# Altium PCB УШЯИ.411618.029Э.pcbdoc (part 5 of 6)
Units mil, origin at the board's own origin, x right, y up, seen from the top; angles counter-clockwise.
Board outline 13385.8 x 6692.9 mil, 4 copper layers (Top Layer, Supply, GND, Bottom Layer), stack 62.3 mil thick; 637 components, 474 nets, 1978 pads, 458 vias.
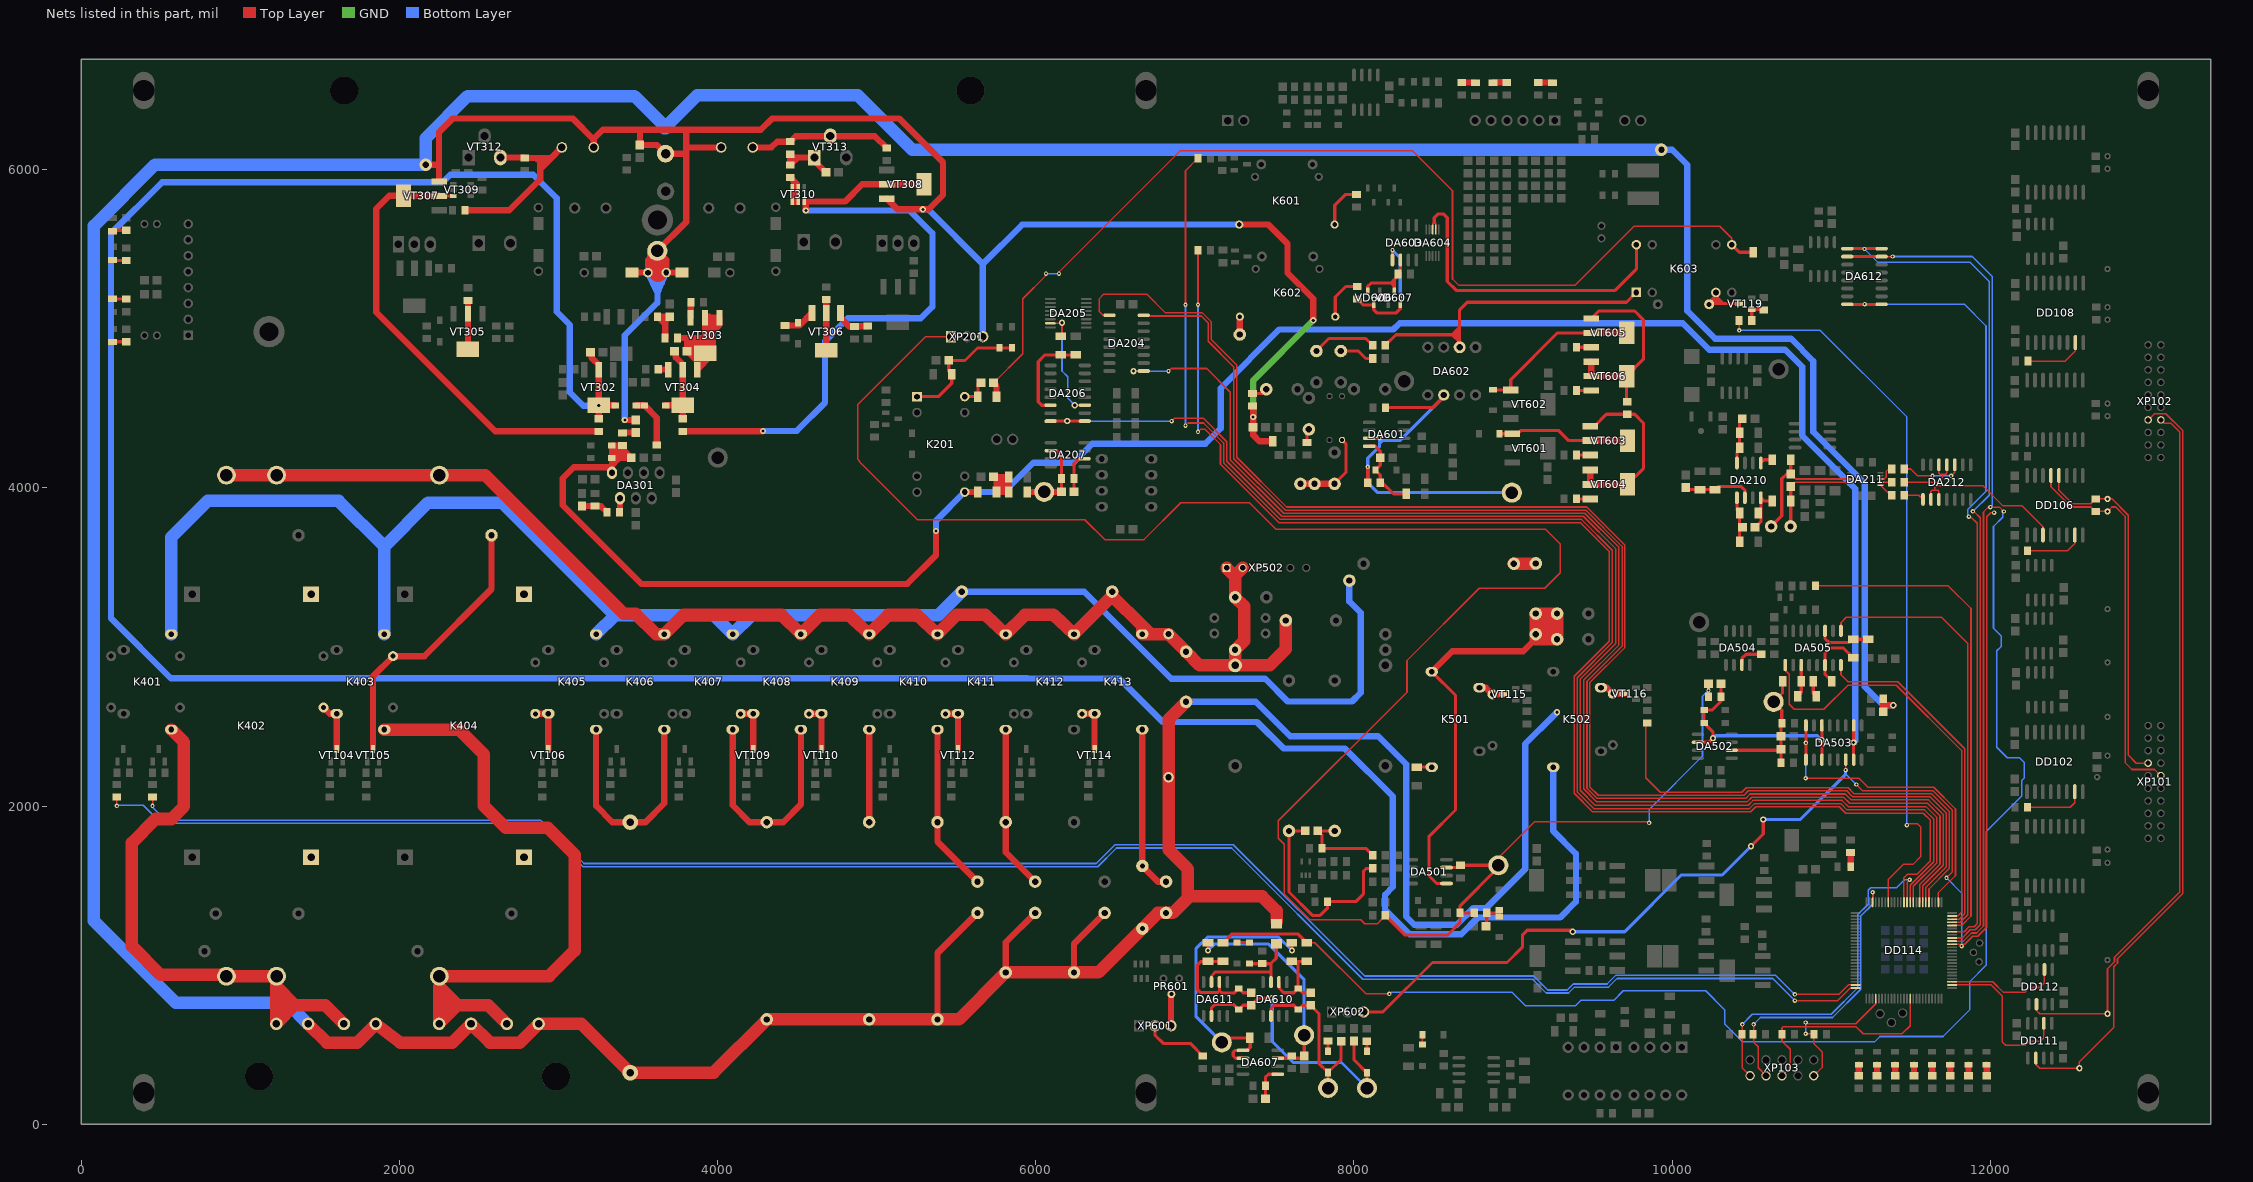
[diagram p7: the nets of this part, all layers, seen from the top]

## Via types
v1: diameter 27.6, hole 11.8, Top Layer to Bottom Layer, 218 vias
v2: diameter 39.4, hole 19.7, Top Layer to Bottom Layer, 213 vias
v3: diameter 27.6, hole 12, Top Layer to Bottom Layer, 24 vias
v4: diameter 78.7, hole 39.4, Top Layer to Bottom Layer, 3 vias

## Nets (pads, with @x,y where several pads share a name; then routed paths per layer and width w, separated by ;. In a path a pad name is that pad's centre, name@x,y a point inside that pad or via, vN(x,y) a via of type N, cw(c..) or ccw(c..) an arc to the next point about the centre after c; other vN are vias at no path point) (continued)
INAM: C302.2 DA301.1 DA503.7 DA503.10 K201.8 R209.2 R303.2 VD301.2 VD302.1 | length 13354.9
  Top Layer w19.7: DA503.7@11140.8,2291.4 v2(11140.8,2399.9) DA503.10@11140.8,2506.8
  Top Layer w39.4: R303.2@3400.2,4263.9 R303.2@3403,4266.6 ; v2(5373.2,3727.9) 5373.2,3576 5193.3,3396.1 3521.6,3396.1 3027.6,3890.1 3027.6,4060.6 3096.5,4129.6 DA301.1@3336.4,4129.6 ; K201.8@5553.6,3973.2 R209.2@5636.7,3974 ; VD302.1@3336.1,4187.9 3336.1,4199.7 VD302.1@3336.2,4199.9 ; VD302.1@3336.1,4187.9 VD302.1@3336.3,4187.9 ; VD302.1@3336.1,4187.9 VD302.1@3336.3,4187.7 ; VD301.2@3336.1,4266.6 R303.2@3403,4266.6 ; VD301.2@3336.1,4266.6 VD302.1@3336.2,4199.9 ; VD301.2@3336.1,4266.6 3369.5,4233.2 ; VD302.1@3336.2,4199.9 VD302.1@3336.3,4187.9 ; VD302.1@3336.2,4199.9 3369.5,4233.2 ; VD302.1@3336.3,4187.7 DA301.1@3336.4,4129.6 ; VD302.1@3336.3,4187.7 VD302.1@3336.3,4187.9 ; VD302.1@3336.3,4187.7 3345.5,4178.4 3372.2,4178.4 ; VD302.1@3336.3,4187.9 3381.7,4187.9 ; DA301.1@3336.4,4129.6 3336.5,4095.4 3336.5,4129.6 3336.5,4142.6 3372.2,4178.4 ; 3369.5,4233.2 R303.2@3400.2,4263.8 ; 3369.5,4233.2 3400.2,4202.5 ; 3372.2,4178.4 3381.7,4187.9 ; 3381.7,4187.9 3382.9,4189.1 3400.2,4189.1 ; 3381.7,4187.9 3400.2,4187.9 ; 3400.2,4187.9 3456.1,4187.9 C302.2@3457.3,4189.1 ; 3400.2,4187.9 3400.2,4189.1 ; 3400.2,4189.1 3413.6,4189.1 ; 3400.2,4189.1 3400.2,4202.5 ; 3400.2,4202.5 3413.6,4189.1 ; 3400.2,4202.5 R303.2@3400.2,4263.8 ; R303.2@3400.2,4263.8 R303.2@3403,4266.6 ; R303.2@3403,4266.6 3403,4243.4 C302.2@3457.3,4189.1 ; 3413.6,4189.1 C302.2@3457.3,4189.1
  Bottom Layer w39.4: v2(5373.2,3727.9) 5373.2,3792.9 5554.7,3974.4 5801.6,3974.4 5985.4,4158.3 6235,4158.3 6354.3,4277.6 7066.5,4277.6 7162.2,4373.2 7162.2,4626.4 7531.5,4995.7 8248.4,4995.7 8287.8,5035 10066.5,5035 10233.4,4868.1 10709.8,4868.1 10816.9,4761 10816.9,4328.3 11151.2,3994.1 11151.2,2410.2 v2(11140.8,2399.9)
INSF: DA604.7 DA604.8 K603.14 | length 2053.5
  Top Layer w10: DA604.8@8494.2,5624 8494.2,5662.8 8498.2,5666.9 8509.9,5666.8 8513.9,5662.8 DA604.7@8513.9,5624
  Top Layer w19.7: 8504.6,5666.9 8504.6,5697.7 8526.3,5720.1 8564.8,5720.1 8586.6,5698.3 8586.6,5296.7 8642,5241.3 9641.7,5241.3 9774.7,5374.4 K603.14@9774.7,5528.1
IOC: C211.1 K603.8 R213.1 R649.2 | length 6608.2
  Top Layer w10: C211.1@5734.2,4659 5918.5,4843.3 5918.5,5189 6064.7,5335.1 v1(6064.7,5346.3) ; v1(6145.9,5345.9) 6145.9,5356.2 6909.4,6119.7 8366.9,6119.7 8619.3,5867.3 8619.3,5312.6 8657.5,5274.4 9390.5,5274.4 9759.4,5643.3 10299.6,5643.3 10374.8,5568.1 K603.8@10374.8,5528.1
  Top Layer w19.7: K603.8@10374.8,5528.1 10422.5,5480.4 R649.2@10508.7,5480.4
  Top Layer w39.4: C211.1@5734.3,4659 5753.2,4640.2 R213.1@5753.1,4572.4
  Bottom Layer w10: v1(6064.7,5346.3) 6145.5,5346.3 v1(6145.9,5345.9)
K201_14: C211.2 K201.14 R213.2 | length 188.6
  Top Layer w19.7: K201.14@5553.6,4573.2 5636.7,4572.4 5636.7,4659 C211.2@5655.6,4659
K402_8: K402.8
K402_10: K402.10
K404_8: K404.8
K404_10: K404.10
K501_14: K501.14 R505.2 | length 94
  Top Layer w19.7: R505.2@8394.8,2244.3 K501.14@8488.8,2244.3
K603_3: K603.3 VD128.2 VT119.3 | length 458.1
  Top Layer w19.7: VD128.2@10236.4,5157.6 10283.6,5157.6 ; 10259.9,5181.3 10283.6,5157.6 ; 10274.4,5195.8 10274.4,5182 10286.4,5170.3 10286.4,5157.6 ; K603.3@10274.4,5203.6 10274.8,5203.2 10320.4,5157.6 ; 10294.8,5178.3 10294.8,5157.6 ; 10302.2,5157.6 10294.8,5157.6 ; VT119.3@10421.4,5157.6 10320.4,5157.6 ; 10283.6,5157.6 10286.4,5157.6 ; 10283.6,5157.6 10294.8,5157.6 ; 10286.4,5157.6 10294.8,5157.6 ; 10294.8,5157.6 10320.4,5157.6
  Top Layer w39.4: VD128.2@10232.3,5153.6 10274.4,5195.8 10274.8,5196.1 10274.8,5203.2 K603.3@10274.8,5228
KT602_1: DA601.7 DA602.2 KT602.1 R610.2 R613.1 | length 2368.6
  Top Layer w19.7: R613.1@8086.6,4033 v1(8086.6,4131.4) ; DA601.7@8095.6,4311.1 8161.5,4311.1 v1@8161.5,4312.5 ; R610.2@8199.2,4504.3 8495.3,4504.3 8564.2,4573.2 DA602.2@8564.2,4583.8
  Bottom Layer w19.7: 8177.2,4296.7 8161.4,4281 ; DA602.2@8564.2,4583.8 8564.2,4573.5 8287.4,4296.7 8177.1,4296.7 8161.4,4312.4 8161.4,4281 ; KT602.1@8992.1,3969.7 8149.6,3969.7 8086.6,4032.7 v1(8086.6,4131.4) 8086.6,4186.5 8161.4,4261.3 8161.4,4281
  other v1: 8161.4,4312.5
KT604_1: C617.1 DA607.7 KT604.1 R636.1 R642.1 | length 1398.6
  Top Layer w19.7: v2(7081.9,1092.2) 7081.9,1139.4 R642.1@7082.6,1140.2 ; DA607.7@7520.9,414.5 7673,414.5 C617.1@7687.3,428.9 ; KT604.1@7686.5,544.3 7687.3,543.5 C617.1@7687.3,429
  Bottom Layer w19.7: v2(7081.9,1092.2) 7122,1132.3 7463.4,1132.3 7686.5,909.1 KT604.1@7686.5,560.5
KT605_1: DA607.1 DA607.2 KT605.1 R638.1 R640.1 | length 1831.8
  Top Layer w19.7: KT605.1@7169.2,514.4 7198,543.1 R638.1@7345.6,543.1 7348.1,540.7 7348.1,484.1 7328.6,464.6 DA607.1@7302.6,464.6 ; DA607.2@7302.6,414.5 7255.6,414.5 7241.3,429 7241.3,452.6 7253.1,464.4 7297.3,464.4 7297.5,464.5 DA607.1@7302.6,464.5 ; R640.1@7609.8,1140.2 7610.2,1139.8 v2(7610.2,1091.8)
  Bottom Layer w19.7: KT605.1@7169.2,514.4 7008.3,675.3 7008.3,1105.1 7079.9,1176.8 7525.2,1176.8 v2(7610.2,1091.8)
LIM: DD112.6 DD114.28 | length 716.7
  Top Layer w10: DD114.28@11759.8,895.2 11760.1,894.9 12015.7,894.9 12082.3,828.3 12216.6,828.3 12248.1,859.7 12311.1,859.7 12339.8,888.5 DD112.6@12339.8,972.6
LIMITN: DD112.2 pad.7@12736.2,694.4 XP102.8 | length 4489.6
  Top Layer w10: DD112.2@12289.8,755.7 12289.8,715.3 12310.7,694.4 pad.7@12736.2,694.4 12736.2,977.9 12780,1021.6 12780,1049.2 13189,1458.2 13189,4351.9 13133.9,4407 13090.6,4407 XP102.8@13070.9,4426.7
LM1: DA612.7 DA612.10 DD114.41 R639.1 R641.1 | length 14071.6
  Top Layer w10: R639.1@7704.3,1140.2 7754.3,1140.2 8075.2,819.3 v1(8222.8,819.3) ; DA612.7@11316.4,5453.3 v1@11385.9,5454 ; DD114.41@11759.9,1151.1 11831,1151.1 11881.9,1202 11913.4,1202 11956.7,1245.3 11956.7,3847.7 11988.2,3879.2 v1@12000,3879.2 ; v1(12000,3879.1) 12056.7,3879.1 v1(12084.6,3851.2)
  Top Layer w19.7: R641.1@7177.1,1140.2 7231.8,1194.9 7649.6,1194.9 R639.1@7704.3,1140.2 ; DA612.10@11101,5453.3 DA612.7@11316.4,5453.3
  Bottom Layer w10: v1(8222.8,819.3) 8233.4,829.9 8992.9,829.9 9077.5,745.3 9392.9,745.3 9426,778.3 9633.1,778.3 9692.9,838.2 10210.6,838.2 10329.5,719.3 10329.5,631.1 10440.9,519.7 11274.4,519.7 11306.3,551.6 11701.9,551.6 11871.2,720.9 11871.2,897.6 11974.8,1001.2 11974.8,1840.2 12197.6,2063 12197.6,2161 12213.8,2177.2 12213.8,2272.4 12182.7,2303.5 12106.3,2303.5 12040.5,2369.3 12040.5,2975.2 12067.7,3002.4 12067.7,3069.3 12019.3,3117.7 12019.3,3757.1 12077.1,3815 12077.1,3843.7 v1(12084.6,3851.2) ; v1@11385.9,5454 11885.9,5454 12011.7,5328 12011.7,3891 v1@11999.9,3879.2
  other v1: 11385.8,5453.9
LM2: DA503.6 DD114.40 XP602.3 | length 8452.3
  Top Layer w10: v1@11090.6,2225.6 DA503.6@11090.8,2291.4 ; v1(11157.5,2135) 11195.3,2097.2 11638.6,2097.2 11761,1974.8 11761,1585 v1(11724.4,1548.4) ; DD114.40@11759.9,1131.4 11806.8,1131.4 ; v1(12023.6,3843.7) 12002,3843.7 11976.4,3818.1 11976.4,1237.4 11921.3,1182.3 11889.8,1182.3 11838.9,1131.4 11831,1131.4 ; 11806.8,1131.4 v1(11818.9,1119.3) 11831,1131.4 ; 11806.8,1131.4 11831,1131.4
  Top Layer w19.7: XP602.3@8060.6,705.5 8181.9,705.5 8493.3,1016.9 8961.8,1016.9 9058.2,1113.4 9058.2,1188.2 9089.4,1219.3 9365.7,1219.3 v2(9374.8,1210.2) ; v2(10495.3,1747.2) 10572,1824 v2(10572,1915.4)
  Bottom Layer w10: 11090.5,2202 v1(11157.5,2135) ; v1(11724.4,1548.4) 11818.9,1453.9 v1(11818.9,1119.3)
  Bottom Layer w19.7: v2(9374.8,1210.2) 9701.2,1210.2 10057.1,1566.1 10314.2,1566.1 v2(10495.3,1747.2) ; v2(10572,1915.4) 10805.1,1915.4 11090.5,2200.8 11090.5,2202 v1(11090.5,2225.6)
NV: C401.2 C501.1 C504.1 FV501.1 K402.4 K402.6 K404.4 K406.14 K408.14 K409.14 K410.14 K411.14 K412.14 K413.14 R401.1 R402.1 R501.1 XP502.1 XP502.2 | length 9010.7
  Top Layer w39.4: 7250.3,3447.1 7253,3450.3 7253.2,3450.5
  Top Layer w78.7: K402.4@913.4,4079.9 K402.6@1228.3,4079.9 K404.4@2252,4079.9 2539,4079.9 3410.6,3208.3 3485.8,3208.3 3613.4,3080.7 3665.8,3080.7 3787,3202 4402.8,3202 K408.14@4524,3080.7 4644.9,3202 4823.5,3202 4953.2,3080.7 5074.1,3202 5252.7,3202 5382.3,3080.8 5503.2,3202 5681.8,3202 5811.4,3080.8 5932.3,3202 6110.9,3202 6240.6,3080.7 R401.1@6480.3,3320.5 ; R401.1@6480.3,3347.6 R401.1@6480.3,3320.5 ; R402.1@6834.6,3081.1 6944.9,2970.9 C401.2@6944.9,2969.68 7030.6,2883.9 FV501.1@7253,2883.9 R501.1@7253,2981.4 ; R402.1@6834.7,3081.1 6773.6,3081 ; XP502.1@7199.9,3497.1 7253,3444 ; C504.1@7253,3312.1 7253,3444 ; FV501.1@7253.1,2884 7469.4,2884 7572,2986.5 C501.1@7572,3166.5 ; R501.1@7253.1,2981.4 7311,3039.3 7311,3254.1 C504.1@7253.07,3312.1 ; XP502.2@7299.9,3497.1 7253.2,3450.5 7253,3450.3 7253,3444 ; R401.1@6480.3,3320.5 6669.7,3131.1 ; 6669.7,3131.1 6719.8,3081 6773.6,3081 ; 6669.7,3131.1 K413.14@6669.7,3080.7 6773.6,3081
ONI1: DD114.61 R158.1 | length 9339.4
  Top Layer w10: v1(6940.9,4390.9) 6957.5,4407.5 7054.7,4407.5 7180.7,4281.5 7180.7,4157.5 7536.9,3801.2 9430.7,3801.2 9623.6,3608.2 9623.6,3027.3 9403.1,2806.8 9403.1,2088.6 9507.9,1983.9 10485.8,1983.9 10517.3,2015.4 11059,2015.4 11098.8,1975.6 11586.6,1975.6 11643.3,1918.9 11643.3,1649.5 11496.1,1502.2 DD114.61@11496.1,1395.2 ; v1@6941,5150.8 6941,5993.6 R158.1@7019.7,6072.3
  Bottom Layer w10: v1(6940.9,4390.9) v1@6940.9,5150.7
  other v1: 6940.9,5150.8
ONI2: DD114.63 R160.1 | length 8689
  Top Layer w10: v1@7019.6,4351.6 7035,4366.9 7065.7,4366.9 7161,4271.6 7161,4147.6 7528.3,3780.3 9423.6,3780.3 9604.7,3599.2 9604.7,3035.4 9384.3,2815 9384.3,2079.5 9499.6,1964.2 10494.5,1964.2 10525.9,1995.6 11050.8,1995.7 11091.3,1955.1 11578.3,1955.1 11623.2,1910.2 11623.2,1656.3 11538.7,1571.8 11479.1,1571.8 11456.7,1549.4 DD114.63@11456.7,1395.2 ; v1(7019.7,5150.8) R160.1@7019.7,5493.6
  Bottom Layer w10: v1(7019.7,4351.6) v1(7019.7,5150.8)
ONI3: DD114.68 R162.1 | length 4599.6
  Top Layer w10: v1@10421.3,4989.4 R162.1@10421.3,5051.3 ; DD114.68@11358.3,1395.2 11358.3,1538.9 11452.3,1633.1 11513.8,1633.1 11561.4,1680.7 11561.4,1870.5 11542.5,1889.4 11484.6,1889.4 v1(11475.2,1879.9)
  Bottom Layer w10: v1(10421.2,4989.4) 10930.3,4989.4 11475.2,4444.5 v1(11475.2,1879.9)
ONI4: DD114.46 R532.1 | length 3110.8
  Top Layer w10: R532.1@10901.6,3383.4 11736,3383.4 11878,3241.4 11878,1308.3 11819.2,1249.5 DD114.46@11759.9,1249.5
OUTAM: C305.1 C312.1 C401.1 C402.2 C403.2 C404.2 C405.2 C514.1 C619.1 C630.1 K601.8 KT302.1 pad.3@3562.2,5352.6 pad.4@3677.9,5352.7 R324.1 R326.2 R402.2 R403.2 R404.2 R405.2 R406.2 R407.2 R408.2 R409.2 R410.2 R411.2 R412.2 R413.2 R520.2 R601.2 R604.1 VD309.2 VD310.1 VD311.1 VT307.3 VT308.3 XP201.3 | length 48622.8
  Top Layer w39.4: v4(2166.1,6030.7) 2243,6030.7 2249.5,6037.1 ; VT307.3@2249.5,5925.5 2249.5,6037.1 ; R324.1@3222,6139.3 3222,6188.9 ; R324.1@3222.1,6139.3 3222.1,6188.9 ; v2@3417.4,4426.7 C305.1@3485.7,4426.1 ; VD309.2@3463.2,5352.6 pad.3@3562.2,5352.6 ; KT302.1@3617.2,5484.8 3562.2,5429.8 pad.3@3562.2,5352.6 ; VD310.1@3673.2,6099.9 3803.1,6099.9 ; VD310.1@3673.3,6099.9 3618.2,6155 3511.9,6155 3511.9,6240.3 3521.8,6250.3 ; pad.4@3677.9,5352.6 3625.8,5352.6 pad.3@3562.2,5352.6 ; VD311.1@3776.9,5352.7 pad.4@3677.9,5352.7 3677.9,5433.8 3622,5489.6 3803.1,5670.7 3803.1,6099.9 ; R326.2@4022,6139.3 3803.1,6139.3 ; 4271.6,6250.3 3803.1,6250.3 ; 4271.7,6250.3 4342.6,6321.2 5141,6321.2 5417.4,6044.8 5417.4,5840.8 5326.8,5750.3 v2(5290.5,5750.3) 5131.2,5750.3 VT308.3@5064.2,5817.2 ; R406.2@5382.3,658.7 5382.3,1076.4 C405.2@5633.8,1327.9 ; R405.2@5811.4,953.9 5811.4,1143.3 C404.2@5996.1,1327.9 ; R404.2@6240.6,953.9 6240.6,1135.4 C403.2@6433.1,1327.9 ; K601.8@7278.7,5654.6 7462.7,5654.6 7581.9,5535.4 7581.9,5351.5 7744.5,5188.9 v2(7744.5,5052.7) ; R601.2@7362.3,4513.3 7366.2,4509.4 v2(7366.2,4444.9) 7366.2,4379.4 7366.2,4332.2 7405.6,4292.8 R604.1@7489.1,4292.8 ; C514.1@11326.8,2592 11326.8,2632.7 ; R520.2@11326.8,2674.7 11326.8,2632.7 ; v2(11389.4,2633.3) 11327.4,2633.3 11326.8,2632.7 ; 2249.5,6037.1 2249.5,6235.9 2334.7,6321.2 3089.8,6321.2 3222,6188.9 ; 3222,6188.9 3222,6192.7 3279.6,6250.3 3521.8,6250.3 ; 3521.8,6250.3 3803.1,6250.3 ; 3803.1,6099.9 3803.1,6139.3 ; 3803.1,6139.3 3803.1,6250.3
  Top Layer w78.7: R413.2@1426.8,631.1 1544.9,513 1736.2,513 1852,628.7 R412.2@1852,631.1 2006.3,513 2334,513 R411.2@2450.4,631.1 2568.5,513 2757.5,513 R410.2@2875.6,631.1 3144.1,631.1 R409.2@3451.2,324 3974.8,324 R408.2@4309.4,658.7 R407.2@4953.1,658.7 R406.2@5382.3,658.7 5516.1,658.7 R405.2@5811.4,953.9 R404.2@6240.5,953.9 ; R404.2@6240.6,953.9 6394.1,953.9 R403.2@6669.7,1229.5 6768.1,1327.9 6818.9,1327.9 6862.2,1327.9 6956.7,1422.4 6956.7,1432.4 ; R402.2@6834.6,2181.1 6834.6,2544.5 C401.1@6944.9,2654.72 ; R402.2@6834.7,2181.1 6834.7,1725.6 6956.7,1603.5 6956.7,1432.4 ; C619.1@7513.8,1272.8 7513.8,1340.9 7422.3,1432.4 6956.7,1432.4
  Top Layer w118.1: KT302.1@3617.2,5484.8 3617.2,5361.2 3625.8,5352.6
  GND w39.4: v2(7366.2,4444.9) 7366.2,4674.4 v2(7744.5,5052.7)
  Bottom Layer w39.4: v2(3417.3,4426.7) 3417.3,4958.2 3622,5162.9 3622,5227.5 ; pad.3@3562.2,5352.6 3622,5227.4 ; 3622,5293.8 3562.3,5352.6 pad.4@3673.5,5352.6 ; 3622.1,5227.4 3646.7,5282.7 ; 3649.5,5288.9 pad.4@3678,5352.6 ; v2(5290.5,5750.3) 5323.3,5750.3 5666.9,5406.7 ; XP201.3@5666.9,4950 5666.9,5406.7 ; C401.1@6944.9,2654.72 7382.7,2654.7 7598.8,2438.6 8151.6,2438.6 8328.3,2261.8 8328.3,1305.1 8379.5,1253.9 8646,1253.9 8751.2,1359.1 8831.5,1359.1 9076.8,1604.3 9076.8,2390.2 9254.3,2567.7 9254.3,2567.9 v2(9275.9,2589.5) ; K601.8@7278.7,5654.6 5914.8,5654.6 5666.9,5406.7 ; v4(9932.3,6124.4) 10000,6124.4 10095,6029.4 10095,5111.7 10269.5,4937.1 10747.1,4937.1 10887.4,4796.8 10887.4,4351.2 11210.2,4028.3 11210.2,2750.4 11327.3,2633.3 v2(11389.4,2633.3)
  Bottom Layer w78.7: R413.2@1426.8,631.1 1295.7,762.2 596.1,762.2 79.5,1278.7 79.5,5645.7 464.6,6030.7 v4(2166.1,6030.7) 2166.1,6198.4 2429.9,6462.2 3477.9,6462.2 3672.2,6267.9 ; 3664.6,6260.2 3672.2,6267.9 ; 3673.2,6260.2 3673.2,6266.9 3672.2,6267.9 ; v4(9932.3,6124.4) 5224.8,6124.4 4880.7,6468.5 3872.8,6468.5 3672.2,6267.9
OUTI: C631.1 K401.14 K403.14 K405.14 K407.14 K602.8 pad.1@7282.3,4963.4 pad.1@7663.4,4024.8 pad.1@7971,3416.9 pad.26 R401.2 R606.1 | length 11267.5
  Top Layer w19.7: C631.1@7877.9,4025.07 7948.9,4096 7948.9,4277.1 R606.1@7925.1,4300.7
  Top Layer w39.4: pad.1@7282.3,4963.4 7282.7,4963.8 K602.8@7282.7,5075.9 ; pad.1@7663.4,4024.8 7877.6,4024.8 C631.1@7877.9,4025.07
  Bottom Layer w39.4: R401.2@5535.4,3347.6 6305.1,3347.6 6852.3,2800.4 7441.3,2800.4 7584.6,2657.1 7987.4,2657.1 8042.9,2712.6 8042.9,3214 7971,3285.9 pad.1@7971,3416.9
  Bottom Layer w78.7: K401.14@567.4,3080.7 567.4,3690.5 795.3,3918.5 1618.9,3918.5 1905.9,3631.5 ; K403.14@1905.9,3080.7 1905.9,3631.5 ; K405.14@3236.6,3080.7 3354,3198 ; R401.2@5535.5,3347.6 5385.9,3198 4212.2,3198 K407.14@4094.9,3080.7 3977.6,3198 3354,3198 ; 1905.9,3631.5 2181.1,3906.7 2645.3,3906.7 3354,3198
OVLB: DD111.6 DD114.27 | length 1013.6
  Top Layer w10: DD114.27@11759.9,875.5 12006,875.5 12075.3,806.2 12075.3,516.5 12096,495.8 12221,495.8 12248,522.8 12315.7,522.8 12335.9,543 DD111.6@12335.9,634.1
OVLBN: DD111.2 pad.6@12559,351.9 XP102.7 | length 4877.6
  Top Layer w10: DD111.2@12285.9,417.1 12285.9,376.7 12310.7,351.9 pad.6@12559,351.9 12559,391.7 12774.9,607.7 12774.9,989.1 12799.2,1013.3 12799.2,1040.9 13208.6,1450.3 13208.6,4359.8 13102.3,4466.1 13031.5,4466.1 XP102.7@12992.1,4426.7
PR: C309.1 K502.14 R315.1 VD303.2 VT302.2 VT302.4 | length 18950.8
  Top Layer w39.4: C309.1@3210.1,4852.9 3210.1,4815.8 3253.4,4772.5 3253.4,4743.3 v2(3253.4,4518.3) ; R315.1@3253.4,4433.9 v2(3253.4,4518.3) ; VD303.2@3355.8,4518.3 v2(3253.4,4518.3)
  Bottom Layer w39.4: v2(3253.4,4518.3) 3251.4,4516.3 3155.7,4516.3 3070.9,4601.2 3070.9,5023.6 2988.6,5105.9 2988.6,5820.9 2842.1,5967.3 2320.1,5967.3 2273.6,5920.9 508.7,5920.9 187.8,5600 187.8,3179.1 564.6,2802.4 5948.4,2802.4 5949.2,2801.6 6524.8,2801.6 6798,2528.3 7390.5,2528.3 7557.5,2361.4 7942.9,2361.4 8244.1,2060.2 8244.1,1491.7 8195.4,1443 8195.4,1349.1 8351.2,1193.3 8673.6,1193.3 8779.5,1299.2 9295.3,1299.2 9394.9,1398.8 9394.9,1700.8 9252.6,1843 K502.14@9252.6,2244.4
PR601_2: PR601.2 XP601.3 | length 199.8
  Top Layer w39.4: XP601.3@6849.8,618.9 6849.8,815.3 PR601.2@6852.2,817.7
R1I: DD114.100 R128.1 | length 11700.4
  Top Layer w10: v1(224.4,2001.2) R128.1@224.4,2056.3 ; v1@10771.7,776.8 11039.4,776.8 11118.4,855.8 DD114.100@11153.6,855.8
  Bottom Layer w10: v1(224.4,2001.2) 227.6,2004.3 389.8,2004.3 501.6,1892.5 2879.1,1892.5 3153.9,1617.7 6389,1617.7 6507.5,1736.2 7230.3,1736.2 8056,910.5 9121.8,910.5 9207.5,824.8 9348.4,824.8 9385.8,862.2 9600,862.2 9653.9,916.1 10632.3,916.1 v1(10771.6,776.8)
R1U: DD114.99 R130.1 | length 11454.7
  Top Layer w10: v1@448.9,2001.2 R130.1@448.9,2056.3 ; v1@10771.7,816.1 11047.3,816.1 11106.6,875.5 DD114.99@11153.6,875.5
  Bottom Layer w10: v1@448.9,2001.2 450,2000 450,1990.5 528.7,1911.8 2887.6,1911.8 3160.8,1638.6 6379.9,1638.6 6498,1756.7 7242.1,1756.7 8067.1,931.7 9129.7,931.7 9217.7,843.7 9340.5,843.7 9378.3,881.5 9590.5,881.5 9644.5,935.4 10650.8,935.4 10770.1,816.1 v1@10771.7,816.1
  other v1: 10771.6,816.1 448.8,2001.2
R104_2: DD102.7 R104.2 | length 378.7
  Top Layer w10: R104.2@12232.4,1992.7 12501.9,1992.7 12530.3,2021 DD102.7@12530.3,2090.1
R106_2: DD106.7 R106.2 | length 370.5
  Top Layer w10: R106.2@12232.4,3603.9 12484.3,3603.9 12530.7,3650.2 DD106.7@12530.7,3703.3
R110_2: DD108.7 R110.2 | length 376.9
  Top Layer w10: R110.2@12236.3,4796.7 12470.5,4796.7 12534.5,4860.7 DD108.7@12534.5,4912.9
R113_2: DD114.73 R113.2 XP103.3 | length 1823.7
  Top Layer w10: v1(10511.8,627.5) 10511.8,515.4 10540.4,486.8 10540.4,354.4 XP103.3@10590,304.8 ; DD114.73@11259.9,1395.2 v1@11259.9,1458.2
  Bottom Layer w10: v1(10511.8,627.5) 10555.1,670.8 11007.9,670.8 11185,848 11185,1308.6 11259.8,1383.4 v1(11259.8,1458.1)
R114_2: DD114.62 R114.2 XP103.1 | length 2239.3
  Top Layer w10: v1(10440.9,627.5) 10440.9,353.9 XP103.1@10490,304.8 ; DD114.62@11476.5,1395.2 11476.5,1521 v1@11492.2,1536.6
  Bottom Layer w10: v1(10440.9,627.5) 10503.9,690.5 11000,690.5 11165.3,855.8 11165.3,1316.5 11232.3,1383.4 11232.3,1470 11248,1485.7 11409.3,1485.7 11460.2,1536.6 v1(11492.1,1536.6)
R115_2: DD114.15 R115.2 XP103.5 | length 1360.2
  Top Layer w10: XP103.5@10690,304.9 10741.3,356 10741.3,471.1 10690,522.3 R115.2@10690,565.6 10690,605.4 10696.4,611.7 11157.5,611.7 11200.9,568.4 11445,568.4 11496.1,619.6 DD114.15@11496.1,788.9
R116_2: DD114.4 R116.2 XP103.9 | length 955.8
  Top Layer w10: v1@10838.7,568.4 10888.1,568.4 10890.9,565.6 10890.9,506.5 10942.1,455.4 10942.1,356.8 XP103.9@10890,304.8 ; v1@10838.7,639.3 10846.5,631.4 11153.6,631.4 11279.6,757.4 DD114.4@11279.6,788.9
  Bottom Layer w10: v1(10838.6,568.4) v1(10838.6,639.3)
R118_2: R118.2 VD102.2 | length 68.9
  Top Layer w39.4: R118.2@11976.4,304.6 VD102.2@11976.4,373.5
R119_2: R119.2 VD103.2 | length 68.9
  Top Layer w39.4: R119.2@11862.3,304.7 VD103.2@11862.3,373.6
R120_2: R120.2 VD104.2 | length 68.9
  Top Layer w39.4: R120.2@11748.1,304.7 VD104.2@11748.1,373.6
R121_2: R121.2 VD105.2 | length 68.9
  Top Layer w39.4: R121.2@11633.9,304.7 VD105.2@11633.9,373.6
R122_2: R122.2 VD106.2 | length 68.9
  Top Layer w39.4: R122.2@11519.8,304.7 VD106.2@11519.8,373.6
R123_2: R123.2 VD107.2 | length 68.9
  Top Layer w39.4: R123.2@11401.6,304.7 VD107.2@11401.6,373.6
R124_2: R124.2 VD108.2 | length 68.9
  Top Layer w39.4: R124.2@11287.5,304.7 VD108.2@11287.5,373.6
R125_2: R125.2 VD109.2 | length 68.9
  Top Layer w39.4: R125.2@11173.4,304.7 VD109.2@11173.4,373.6
R163_2: R162.2 R163.2 VT119.1 | length 144.9
  Top Layer w19.7: R162.2@10500.4,5051.3 10500.4,5120.2 10574.4,5120.2 R163.2@10574.4,5118.2
R205_1: DA206.14 R205.1 R206.2 | length 592.1
  Top Layer w19.7: DA206.14@6093.1,4519.3 6037,4519.3 6015.7,4540.5 6015.7,4792.5 6058.5,4835.3 R205.1@6157.5,4835.3 R206.2@6251.9,4835.3
R205_2: DA205.15 DA206.3 R205.2 | length 777.1
  Top Layer w10: DA205.15@6091.9,5034.2 6161.6,5034.2 v2(6164.7,5037.3) 6164.7,4958.9 R205.2@6157.5,4951.7 ; v2(6245.5,4519.3) DA206.3@6308.5,4519.3
  Bottom Layer w10: v2(6164.7,5037.3) 6164.7,4734.1 6200.8,4698 6200.8,4564 v2(6245.5,4519.3)
R207_1: C207.1 DA207.2 R207.1 | length 260.1
  Top Layer w19.7: C207.1@6240.3,3976.2 6240.3,4145.4 6236.3,4149.4 6270.4,4183.4 DA207.2@6307.5,4183.4
R207_2: C207.2 DA207.6 KT202.1 R207.2 R208.1 | length 526.7
  Top Layer w19.7: DA207.6@6094.5,4233.4 6132.7,4233.4 6161.6,4204.5 C207.2@6161.6,3976.2 ; C207.2@6159.3,3974 6159.7,3974.4 C207.2@6161.5,3976.2
  Top Layer w39.4: R208.1@5946.1,3974 KT202.1@6053.1,3974 6159.3,3974 6159.7,3974.4 C207.2@6161.5,3976.1
R208_2: C209.2 R208.2 R209.1 R211.2 | length 603.2
  Top Layer w39.4: R209.1@5753.1,3992 5782.1,4021.1 ; R209.1@5753.1,3992 R209.1@5753.1,3974 R208.2@5829.6,3974 ; R209.1@5753.1,3992 C209.2@5753.1,4049.9 ; C209.2@5753.1,4049.9 5782.1,4021.1 ; C209.2@5753.1,4049.9 5734.3,4068.5 C209.2@5753.1,4068.5 ; C209.2@5753.1,4049.9 C209.2@5753.1,4068.5 ; C209.2@5753.1,4068.5 R211.2@5829.6,4068.5 ; 5782.1,4021.1 R211.2@5829.6,4068.5 ; 5782.1,4021.1 R208.2@5829.6,3974 ; R208.2@5829.6,3974 R211.2@5829.6,4068.5
R210_2: C208.2 K201.1 R210.2 VD201.2 VD202.1 | length 833.6
  Top Layer w19.7: K201.1@5253.6,4573.2 5387,4573.2 5471.6,4657.8 R210.2@5471.6,4713.8 5452.8,4732.6 5452.8,4800.4 5555.2,4800.4 5633.9,4879.1 5771.7,4879.1 VD201.2@5850.4,4879.1
R217_2: C214.1 DA210.8 R217.2 R218.2 | length 294.5
  Top Layer w19.7: DA210.8@10407.3,4155.9 10407.3,4230.7 R218.2@10428.1,4251.4 ; R218.2@10424,4251.4 R217.2@10424,4345.9 10424,4417.6 C214.1@10441.1,4434.6
R219_2: C215.1 DA210.2 R219.2 R220.2 | length 440.3
  Top Layer w19.7: C215.1@10086.6,4001.5 10099.8,3988.5 10175.2,3988.5 R220.2@10269.6,3988.5 ; R220.2@10269.8,3988.5 10288.6,4007.3 10435,4007.3 10457.3,3985.1 DA210.2@10457.3,3937.6
R222_1: C216.1 DA210.1 R221.1 R222.1 | length 283.6
  Top Layer w19.7: DA210.1@10407.3,3937.6 10407.3,3858.8 10424,3842 R221.1@10424,3660.9
R222_2: C216.2 DA210.4 R222.2 R223.2 | length 281
  Top Layer w19.7: C216.2@10521.6,3751.4 10557.3,3787.1 10557.3,3937.6 10578.1,3916.8 R223.2@10628.7,3916.8
R223_1: C217.2 DA211.4 KT203.1 R223.1 | length 637
  Top Layer w10: C217.2@10745.2,4007.3 10773.7,4035.7 DA211.4@11120.1,4035.7
  Top Layer w19.7: KT203.1@10744.1,3757.4 10745.2,3758.5 10745.2,3916.8 C217.2@10745.2,4007.3
R224_1: C217.1 DA211.3 KT204.1 R224.1 | length 873.4
  Top Layer w10: C217.1@10745.2,4086.1 10775.9,4055.4 DA211.3@11120.1,4055.4
  Top Layer w19.7: KT204.1@10622.1,3757.4 10689,3824.3 10689,4056.6 10718.6,4086.1 10745.2,4086.1 R224.1@10745.2,4176.6
R224_2: DA210.5 R224.2 | length 79.9
  Top Layer w19.7: DA210.5@10557.3,4155.9 10578.1,4176.6 R224.2@10628.7,4176.6
R225_1: DA212.3 R225.1 | length 392.5
  Top Layer w10: R225.1@11458.7,4118.4 11500,4118.4 11543.8,4074.7 v1@11636.3,4074.7 ; v1@11753.6,4074.8 11776.5,4097.6 DA212.3@11776.5,4144.8
  Bottom Layer w10: v1(11636.2,4074.7) v1(11753.5,4074.7)
R225_2: DA211.8 R225.2 | length 117.9
  Top Layer w10: DA211.8@11309.1,4055.5 11332.7,4055.5 11344.5,4067.3 11344.5,4102.9 11360,4118.5 R225.2@11380,4118.5
R226_1: DA212.4 DA212.5 R226.1 | length 432.3
  Top Layer w10: R226.1@11458.7,4035.7 11668.1,4035.7 11700.2,4067.8 11700.2,4085.7 ; DA212.5@11676.4,4144.8 11676.4,4093.2 11683.9,4085.7 11700.2,4085.7 ; DA212.4@11726.4,4144.8 11726.4,4092.8 11719.3,4085.7 11700.2,4085.7
R226_2: DA211.7 R226.2 | length 70.9
  Top Layer w10: DA211.7@11309.1,4035.7 R226.2@11380,4035.7
R227_1: DA212.8 R227.1 | length 128.7
  Top Layer w10: R227.1@11458.7,3953.1 11550,3953.1 DA212.8@11576.5,3926.7
R227_2: DA211.6 R227.2 | length 97
  Top Layer w10: DA211.6@11309.1,4016.1 11372.1,3953.1 R227.2@11380,3953.1
R301_1: C301.2 R301.1 R302.2 | length 173.5
  Top Layer w39.4: C301.2@3148.2,3885.1 R302.2@3229.7,3885.1 3267.1,3885.1 R301.1@3305.7,3846.5
R301_2: DA301.2 R301.2 | length 89.4
  Top Layer w39.4: R301.2@3384.5,3846.5 3386.5,3846.5 DA301.2@3386.5,3933.9
R303_1: C305.2 R303.1 | length 83.5
  Top Layer w39.4: R303.1@3403,4345.4 3405,4347.3 C305.2@3485.7,4347.3
R304_1: R304.1 VD303.1 VD304.2 | length 331.8
  Top Layer w39.4: VD303.1@3489.6,4518.3 3540.8,4518.3 3618.3,4440.7 R304.1@3618.3,4269.8
R307_2: C307.2 R307.2 R308.2 | length 287
  Top Layer w39.4: R308.2@3670.7,4941.8 3670.7,5028.4 ; 3670.7,5028.4 3623.5,5075.7 3698.3,5075.7 3670.7,5048.1 3670.7,5028.4
R308_1: C310.2 R308.1 VT303.1 VT303.2 VT303.4 VT304.1 | length 2182.3
  Top Layer w39.4: R308.1@3749.5,4941.8 3804.6,4941.8 ; 3845.1,4859.1 3845.1,4941.8 ; VT303.4@3947.8,4827.9 VT303.4@3947.8,4847.1 ; 3947.8,5076 3947.8,5070.4 ; 3964.5,5027.3 3947.8,5044 ; VT303.4@3969.3,4822.3 3969.3,4983.7 ; 3969.3,5070.3 3969.3,5027.6 ; 3804.6,4941.8 3808.5,4937.9 C310.2@3808.5,4859.1 ; 3804.6,4941.8 3845.1,4941.8 ; C310.2@3808.5,4859.1 3871.5,4796.1 ; C310.2@3808.5,4859.1 VT303.4@3874.2,4859.1 ; 3845.1,4941.8 3874.2,4941.8 ; 3871.5,4796.1 3871.5,4743.3 3961.7,4833.5 3961.7,4847.1 VT303.4@3947.8,4847.1 ; 3871.5,4796.1 3871.5,4797.1 VT303.4@3921.5,4847.1 ; VT303.4@3874.2,4859.1 VT303.4@3921.5,4859.1 ; VT303.4@3874.2,4859.1 3874.2,4896.8 ; VT303.4@3874.2,4859.1 3874.2,4852.5 3879.6,4847.1 VT303.4@3921.5,4847.1 ; 3874.2,4896.8 3874.2,4941.8 ; 3874.2,4896.8 3895.9,4896.8 3895.9,4941.8 ; 3874.2,4941.8 3895.9,4941.8 ; 3895.9,4941.8 3921.5,4941.8 ; VT303.4@3921.5,4847.1 VT303.4@3921.5,4859.1 ; VT303.4@3921.5,4847.1 VT303.4@3947.8,4847.1 ; VT303.4@3921.5,4859.1 3921.5,4941.8 ; 3921.5,4941.8 3921.5,4979.8 ; 3921.5,4941.8 3947.8,4941.8 ; 3921.5,4979.8 VT303.2@3921.5,5070.4 ; 3921.5,4979.8 3947.8,5006.1 ; VT303.2@3921.5,5070.4 3947.8,5070.4 ; VT303.2@3921.5,5070.4 3947.8,5044 ; VT303.4@3947.8,4847.1 3947.8,4941.8 ; 3947.8,4941.8 3947.8,5006.1 ; 3947.8,5006.1 3947.8,5044 ; 3947.8,5006.1 3969.3,5027.6 ; 3947.8,5044 3947.8,5070.4 ; 3947.8,5070.4 VT303.1@4012.1,5070.4 ; 3969.3,4983.7 4012.1,5026.5 VT303.1@4012.1,5070.4 ; 3969.3,4983.7 3969.3,5027.6 ; 3969.3,5027.6 VT303.1@4012.1,5070.4
R309_2: R309.2 VT303.3 | length 96.3
  Top Layer w39.4: VT303.3@3830.9,5070.4 3832.1,5071.5 R309.2@3832.1,5166.2
R310_2: R310.2 VT304.3 | length 63.7
  Top Layer w39.4: R310.2@3627.4,4745 3629.1,4743.3 VT304.3@3690.4,4743.3
R314_1: R314.1 VT305.2 VT305.4 | length 308.5
  Top Layer w39.4: VT305.4@2431.3,4870.2 2431.3,5093.4 R314.1@2431.3,5178.7
R315_2: R315.2 VT307.2 VT307.4 VT309.3 | length 2876.1
  Top Layer w19.7: VT307.4@2026.3,5836.9 VT307.4@2027.2,5835.9 ; VT307.2@2249.5,5834.9 VT309.3@2338.6,5834.9
  Top Layer w39.4: VT307.4@2026.2,5834.9 1936.1,5834.9 1854.3,5753.1 1854.3,5103.5 2602.7,4355.2 R315.2@3253.3,4355.2 ; VT307.4@2028.2,5834.9 VT307.2@2249.5,5834.9
R316_2: R316.2 VT308.2 VT308.4 VT310.3 | length 4279.3
  Top Layer w39.4: R316.2@3780.9,4355.2 4283.1,4355.2 v2(4285.5,4357.5) ; VT310.3@4554.6,5799.7 4801.4,5799.7 4909.5,5907.8 VT308.2@5064.2,5907.8 VT308.4@5298.1,5907.8 ; v2@4555.2,5742.4 VT310.3@4555.2,5797.5
  Bottom Layer w39.4: v2(4285.5,4357.5) 4497.3,4357.5 4676,4536.2 4676,4922.8 4818.5,5065.3 5277.2,5065.3 5350.4,5138.6 5350.4,5599.6 5207.6,5742.4 v2(4555.1,5742.4)
R317_2: R317.2 VD306.1 VT306.3 | length 201.4
  Top Layer w39.4: R317.2@4424,5019.8 4513.8,5019.8 VT306.3@4592.7,5098.7
R318_2: R318.2 R319.2 VT306.1 | length 221.8
  Top Layer w39.4: VT306.1@4773.8,5098.7 4773.8,5068.4 4826.3,5015.9 R319.2@4943.6,5015.9
R320_1: R320.1 VT306.2 VT306.4 | length 318.9
  Top Layer w39.4: VT306.4@4683.2,4864.9 R320.1@4684,5183.8
R322_1: R322.1 R323.2 R324.2 VT312.3 | length 1329.7
  Top Layer w39.4: R323.2@2413.5,5744.4 2691,5744.4 2885.9,5939.3 2885.9,6011.2 ; VT312.3@2635.5,6075.4 2785.2,6075.4 2787.5,6073.1 2862.3,6073.1 ; R322.1@2787.5,6073.2 2862.2,6073.2 2862.3,6073.1 ; 2895.3,6073.1 2917.5,6050.9 2917.5,6034.7 ; 2955.8,6073.1 2917.5,6034.7 ; R324.2@3022.1,6139.3 2955.9,6073.1 2862.3,6073.1 ; 2862.3,6073.1 2885.9,6049.5 2885.9,6011.2 ; 2885.9,6011.2 2893.9,6011.2 2917.5,6034.7
R326_1: R326.1 R327.2 R328.2 VT313.2 | length 901.2
  Top Layer w39.4: R326.1@4222.1,6139.3 4338.6,6139.3 4374.8,6175.5 4456.8,6175.5 4491.6,6210.4 VT313.2@4708.7,6210.4 4988.8,6210.4 R327.2@5063,6136.1
R328_1: C314.2 R328.1 R329.2 VT313.1 | length 415.1
  Top Layer w39.4: C314.2@4681.2,5982.6 4608.7,6055 VT313.1@4608.7,6075.4 4502.3,6075.4 ; 4502.3,6075.4 4456.8,6029.8 4456.8,6096.8 4478.1,6075.4 4502.3,6075.4
R329_1: R329.1 VT310.1 VT310.2 VT310.5 VT310.6 | length 354.7
  Top Layer w39.4: R329.1@4456.8,5951.1 4480.4,5927.5 4480.4,5797.5 4500.1,5797.5 4500.1,5908 R329.1@4456.8,5951.1
R403_1: C402.1 K413.8 R403.1 | length 1047.5
  Top Layer w39.4: K413.8@6669.7,2480.7 R403.1@6669.7,1623.2 6768.1,1524.8 C402.1@6818.9,1524.83
R405_1: C404.1 K411.8 R405.1 | length 1032.4
  Top Layer w39.4: K411.8@5811.4,2480.7 R405.1@5811.4,1898.8 5811.4,1709.4 C404.1@5996.1,1524.83
R406_1: C405.1 K410.8 R406.1 | length 1060
  Top Layer w39.4: K410.8@5382.3,2480.7 R406.1@5382.3,1898.8 5382.3,1776.4 C405.1@5633.8,1524.83
R407_1: K409.8 R407.1 | length 581.9
  Top Layer w39.4: R407.1@4953.2,1898.8 K409.8@4953.2,2480.7
R408_1: K407.8 K408.8 R408.1 | length 1466.1
  Top Layer w39.4: K407.8@4094.9,2480.7 4094.9,2004.7 4200.8,1898.8 4309.5,1898.8 4413.4,1898.8 4524,2009.4 K408.8@4524,2480.7
R409_1: K405.8 K406.8 R409.1 | length 1463.8
  Top Layer w39.4: K405.8@3236.6,2480.7 3236.6,2000.8 3338.6,1898.8 R409.1@3451.2,1898.8 3547.3,1898.8 3665.8,2017.3 K406.8@3665.8,2480.7
R410_1: K403.8 K404.3 R410.1 R411.1 | length 4278.9
  Top Layer w78.7: K403.8@1905.9,2480.7 2374.8,2480.7 2531.5,2324 2531.5,2001.2 2669.3,1863.4 2933.1,1863.4 3102.4,1694.1 3102.4,1091.7 2940.9,930.3 K404.3@2252,930.3 K404.3@2252,921.9 ; 2250.3,749.2 2252,749.2 ; 2250.3,865 2252,863.4 ; 2252,865 2252,863.4 ; R410.1@2675.6,631.1 2557.5,749.2 2366.1,749.2 ; R411.1@2252,635 2250.4,633.5 R411.1@2250.4,631.1 2252,631.1 R411.1@2252,635 ; R411.1@2252,635 2366.1,749.2 ; R411.1@2252,635 2252,749.2 ; 2252,749.2 2366.1,749.2 ; 2252,749.2 2252,863.4 ; 2252,863.4 2366.1,749.2
R412_1: K401.8 K402.3 K402.5 R412.1 R413.1 | length 3675.1
  Top Layer w78.7: K401.8@567.3,2480.7 646.1,2402 646.1,1997.2 567.3,1918.5 468.5,1918.5 318.9,1768.9 318.9,1119.3 500,938.2 905.5,938.2 K402.3@913.4,930.3 K402.5@1228.3,930.3 ; K402.5@1228.5,926.5 1226.8,924.8 1226.8,865 ; R412.1@1652,631.1 1533.9,749.2 1342.6,749.2 1226.8,865 ; 1226.8,749.2 1342.5,749.2 1226.8,633.5 R413.1@1226.8,631.1 1226.8,749.2 ; 1226.8,749.2 1226.8,865
R502_2: C502.2 C506.1 C507.2 DA501.5 K501.8 R502.2 | length 3097.6
  Top Layer w19.7: K501.8@8488.9,2844.4 8637.8,2695.5 8637.8,1975.1 8472.5,1809.8 8472.5,1560.6 8519.9,1513.1 DA501.5@8581.6,1513.1
  Top Layer w39.4: K501.8@8488.9,2844.4 8618,2973.5 9064.1,2973.5 R502.2@9142.8,3052.3
  Top Layer w78.7: C502.2@9142.8,3209.72 R502.2@9142.8,3079.8 9142.8,3048.4 9205.8,3048.4 ; C502.2@9142.8,3209.8 C506.1@9276.7,3209.8 ; 9205.8,3052.3 9205.8,3175.1 9209.7,3205.8 ; C507.2@9276.6,3048.3 9205.8,3048.4 ; C506.1@9276.67,3209.7 9276.6,3048.4 9205.8,3048.4
R503_2: C502.1 R503.2 | length 138.5
  Top Layer w78.7: R503.2@9005.1,3522.8 9140.9,3522.8 C502.1@9142.8,3524.68
R506_1: C505.2 P501.2 P505.2 R506.1 | length 1302
  Top Layer w19.7: C505.2@7694,1843.6 7591.7,1843.6 7591.7,1459.5 7738.6,1312.6 7787.4,1312.6 7834.7,1359.8 7834.7,1399.2 8011.9,1399.2 8059.1,1446.4 8059.1,1588.1 8078.8,1607.8 P501.2@8118.1,1607.8
R507_2: C505.1 P503.2 P507.1 R507.2 | length 563.8
  Top Layer w19.7: R507.2@7879.1,1843.6 7772.8,1843.6 7799.3,1817.1 7799.3,1733.8 8074.8,1733.8 P503.2@8118.1,1690.5
R512_2: C511.2 R512.2 VD504.2 VD505.1 | length 203.7
  Top Layer w19.7: C511.2@8830.7,1245.6 8834.7,1249.5 R512.2@8834.7,1327.2 ; R512.2@8834.7,1328.3 R512.2@8834.7,1327.2 ; VD505.1@8913.4,1306 8913.4,1327.2 ; VD504.2@8913.4,1346.6 8913.4,1327.2 ; R512.2@8834.7,1327.2 8913.4,1327.2
R518_2: C512.1 DA502.2 DA503.3 DA503.14 R518.2 VD506.1 VD507.2 | length 1463.6
  Top Layer w19.7: DA502.2@10161.2,2400.5 10230,2400.5 v2(10255.9,2426.4) 10255.9,2466.1 VD507.2@10200.8,2521.2 VD506.1@10200.8,2603.8 10252.2,2603.8 10307.1,2658.7 R518.2@10307.1,2686.5 C512.1@10307.1,2769.2 ; DA503.3@10940.8,2291.4 v2(10940.8,2414) DA503.14@10940.8,2506.8
  Bottom Layer w19.7: v2(10255.9,2426.4) 10271.6,2442.1 10912.6,2442.1 v2(10940.8,2414)
R523_1: DA505.3 R523.1 R524.2 | length 204.8
  Top Layer w19.7: R524.2@10788.3,2690.5 10810.9,2713.1 DA505.3@10810.9,2885.9
R524_1: R524.1 R525.2 | length 102
  Top Layer w19.7: R525.2@10886.7,2785 10886.7,2708.5 R524.1@10904.7,2690.5
R525_1: DA505.6 R525.1 R526.2 | length 410
  Top Layer w19.7: R525.1@11003.1,2785 10960.9,2827.2 10960.9,2885.9 10960.9,2962 10992,2993.3 11076,2993.3 R526.2@11137.8,2931.5
R526_1: DA505.11 R526.1 R527.2 | length 338.1
  Top Layer w19.7: DA505.11@10960.9,3101.3 10960.9,3052.2 10984.3,3028.8 11118.7,3028.8 R526.1@11137.8,3047.9 R527.2@11232.3,3047.9
R529_2: DA504.3 R529.2 | length 172.3
  Top Layer w19.7: DA504.3@10438.4,2887.1 10438.4,2927.8 10464.9,2954.2 R529.2@10559.1,2954.2
R601_1: C601.2 R601.1 | length 98.1
  Top Layer w19.7: R601.1@7362.2,4592 7421.3,4592 C601.2@7448.9,4619.6
R602_1: C602.2 R602.1 | length 94.5
  Top Layer w19.7: R602.1@7704.8,4284.9 7704.8,4367.6 C602.2@7716.6,4367.6
R607_1: C604.2 R607.1 | length 404.9
  Top Layer w19.7: C604.2@7763.8,4859.73 7842.6,4938.5 8074.8,4938.5 R607.1@8118.1,4895.2
R607_2: DA602.6 K603.1 R607.2 | length 2123.5
  Top Layer w19.7: R607.2@8196.9,4895.2 8263.8,4962.1 8618.1,4962.1 ; 8644.6,4988.6 8652,4981.2 8664.1,4981.2 ; 8664.1,4944.1 8658.7,4944.1 8647.4,4932.8 ; 8664.1,4956.9 8654.8,4956.9 8639,4941.2 ; 8664.1,4962.9 8618.1,4962.1 ; 8664.1,4969.7 8646.9,4969.7 8636.3,4980.3 ; 8664.1,5008.2 8636.3,4980.3 ; DA602.6@8664.2,4883.8 DA602.6@8664.2,4916.1 ; K603.1@9774.8,5228.1 9713.3,5166.5 8712.3,5166.5 8664.2,5118.4 8664.2,5008.2 DA602.6@8664.2,4916.1 ; 8618.1,4962.1 8636.3,4980.3 ; 8618.1,4962.1 8639,4941.2 ; 8639,4941.2 8647.4,4932.8 ; 8647.4,4932.8 DA602.6@8664.2,4916.1
R608_1: C605.2 R608.1 | length 220.3
  Top Layer w19.7: C605.2@7917.4,4859.7 8027.6,4859.7 8074.8,4812.5 R608.1@8118.1,4812.5
R613_2: C608.2 DA601.8 R611.1 R613.2 VD601.1 | length 497.1
  Top Layer w19.7: DA601.8@8095.6,4261.1 8134.1,4261.1 8165.4,4229.8 8165.4,4190.4 8165.4,4142.9 8134.2,4111.7 8165.4,4080.5 8165.4,4033 8177.8,4033 8248.6,3962.1 R611.1@8327.7,3962.1
R615_1: R615.1 VT603.3 | length 87.8
  Top Layer w19.7: R615.1@9397.7,4206.2 VT603.3@9485.5,4206.2
R616_1: R616.1 VT604.3 | length 87.8
  Top Layer w19.7: R616.1@9397.7,3930.6 VT604.3@9485.5,3930.6
R617_1: R617.1 VT605.1 VT606.1 VT606.2 VT606.4 | length 1244.4
  Top Layer w19.7: VT605.1@9490.8,5064.5 9538,5111.7 9763.8,5111.7 9818.9,5056.6 9818.9,4807.2 VT606.4@9714,4702.3 9714,4543.4 R617.1@9716.6,4540.9
  Top Layer w39.4: VT606.2@9490.7,4702.3 VT606.1@9490.7,4792.8 ; VT606.2@9490.8,4702.3 VT606.4@9714,4702.3
R617_2: R617.2 VT603.1 VT604.1 VT604.2 VT604.4 | length 1138.6
  Top Layer w19.7: VT603.1@9485.5,4387.3 9511.8,4387.3 9586.7,4462.1 9716.6,4462.1 9763.8,4462.1 9818.9,4407 9818.9,4120.8 VT604.4@9719.3,4021.2
  Top Layer w39.4: VT604.1@9485.4,4111.7 VT604.2@9485.4,4021.2 VT604.4@9719.3,4021.2
R618_2: R618.2 VT605.3 | length 93.1
  Top Layer w19.7: R618.2@9397.7,4883.4 VT605.3@9490.8,4883.4
R619_2: R619.2 VT606.3 | length 93.1
  Top Layer w19.7: R619.2@9397.7,4611.7 VT606.3@9490.8,4611.7
R620_1: K601.14 R620.1 | length 287.7
  Top Layer w19.7: K601.14@7879.1,5653.6 7879.1,5776.9 7945.2,5843 R620.1@8016.1,5843
R621_1: K602.14 R621.1 | length 287.7
  Top Layer w19.7: K602.14@7882.7,5075.9 7882.7,5199.2 7948.8,5265.3 R621.1@8019.7,5265.3
R621_2: DA603.5 R621.2 VD606.1 VD607.3 | length 788.1
  Top Layer w19.7: R621.2@8021.1,5185.1 R621.2@8019.7,5186.5 8056.5,5149.7 VD606.1@8124,5149.7 ; VD606.1@8124.1,5149.7 8124.1,5119.5 8143.8,5099.9 8265.8,5099.9 8291.4,5125.5 8291.4,5149.7 v1@8291.4,5190.4 ; DA603.5@8242,5431.7 v1@8242.2,5493.6
  Bottom Layer w19.7: v1(8242.1,5493.6) 8291.3,5444.4 v1(8291.3,5190.4)
R629_1: R629.1 XP601.2 | length 414.1
  Top Layer w19.7: XP601.2@6749.8,618.9 6749.8,559.6 6801.2,508.3 6970.9,508.3 R629.1@7050.4,428.7
R635_1: C616.1 DA607.5 R635.1 | length 221.8
  Top Layer w19.7: C616.1@7443.2,159 7442.9,159.3 7442.9,294.3 7463.2,314.6 DA607.5@7520.9,314.6
R639_2: C621.1 DA610.2 R639.2 R640.2 VD613.2 | length 537.7
  Top Layer w19.7: DA610.2@7528.4,893.3 7528.4,856.6 7558.8,826.2 7621.8,826.2 ; R640.2@7609.8,1023.8 7653.1,1023.8 ; 7621.9,826.2 VD613.2@7649.2,853.4 ; R639.2@7704.3,1023.8 7653.1,1023.8 ; C621.1@7727.9,826.2 7676.4,826.2 VD613.2@7649.2,853.4 ; VD613.2@7649.2,853.4 7649.2,1019.8 7653.1,1023.8
R642_2: C620.1 DA611.2 R641.2 R642.2 VD612.1 | length 760.2
  Top Layer w19.7: DA611.2@7154.5,893.6 7154.5,841 ; R641.2@7177.1,1023.8 R642.2@7082.6,1023.8 7039.5,1023.8 7014.6,998.8 7014.6,848.8 7036.4,827 7140.6,827 7154.5,841 ; C620.1@7353.9,826.7 7302.4,826.7 VD612.1@7275.2,854 7245.4,824.3 7171.2,824.3 7154.5,841
R701_2: R701.2 VD701.1 | length 87.4
  Top Layer w19.7: VD701.1@196.7,4916 198.7,4918 R701.2@283.3,4918
R703_2: R703.2 VD703.1 | length 87.4
  Top Layer w19.7: VD703.1@196.7,5431.8 198.7,5429.8 R703.2@283.3,5429.8
R706_2: R706.2 VD706.1 | length 87.4
  Top Layer w39.4: VD706.1@8874.1,6546.8 8876.1,6548.7 R706.2@8960.7,6548.7
RN: DA212.9 DA212.10 DD106.3 | length 1020.3
  Top Layer w10: DA212.9@11626.4,3926.7 11626.4,3978.7 11633.5,3985.8 11649.6,3985.8 ; DA212.10@11676.4,3926.7 11676.4,3978.3 11668.9,3985.8 11649.6,3985.8 ; DD106.3@12330.7,3703.3 12330.7,3755.9 12200.4,3886.2 12079.9,3886.2 11953.1,4013 11661.1,4013 11649.6,4001.4 11649.6,3985.8
RUN_N: DD106.13 pad.10 R105.2 XP101.12 | length 2442.6
  Top Layer w10: DD106.13@12380.7,4077.4 12380.7,4006.7 12508,3879.4 12633,3879.4 12661.5,3851 12736.3,3851.9 12763.8,3879.4 12787.4,3879.4 12846.4,3820.4 12846.4,2273.2 12889.7,2229.8 13031.5,2229.8 XP101.12@13070.8,2190.5
RUN_P: DD106.12 pad.11 R105.1 XP101.13 | length 2273.9
  Top Layer w10: DD106.12@12430.7,4077.4 12430.7,3984.3 12515.8,3899.1 12630.3,3899.1 12661.5,3929.7 pad.11@12736.3,3930.6 ; pad.11@12736.2,3930.6 12763.8,3930.6 12866.1,3828.3 12866.1,2320.4 12917.3,2269.2 XP101.13@12992.1,2269.2
ST1: DA204.1 DD114.58 | length 8377.5
  Top Layer w10: v2(6614.2,4733.5) DA204.1@6678.6,4734.3 ; v1@6834.7,4733.5 6835.8,4733.5 6852.4,4750 7074,4750 7223.2,4600.8 7223.2,4175.3 7557.9,3840.5 9451,3840.5 9665.3,3626.2 9665.3,3012.8 9444.5,2791.9 9444.5,2107.9 9446.7,2105.7 9446.7,2104.8 9521.5,2030.1 9522.3,2030.1 9526.4,2026 10470.1,2026 10500,2055.9 11077.1,2055.9 11115.3,2017.7 11604.3,2017.7 11683.4,1938.6 11683.4,1633.3 11556.3,1506.2 11556.3,1396.4 DD114.58@11555.2,1395.2
  Bottom Layer w10: v2@6614.2,4733.4 v1@6834.6,4733.4
  other v1: 6834.6,4733.5
ST2: DA204.8 DD114.57 | length 8558.9
  Top Layer w10: DA204.8@6678.5,5084.2 6694.5,5084.2 6699.1,5079.7 7039.6,5079.7 7083.8,5035.4 7083.8,4920.5 7244.9,4759.4 7244.9,4182.7 7567.3,3860.2 9456.7,3860.2 9685,3631.8 9685,3004.9 9464.6,2784.5 9464.6,2112.2 9528.9,2047.9 10461.7,2047.9 10489.3,2075.6 11087.8,2075.6 11124.8,2038.6 11611.4,2038.6 11703.1,1946.8 11703.1,1627.2 11574.8,1498.8 DD114.57@11574.8,1395.2
ST3: DA204.9 DD114.56 | length 9084.8
  Top Layer w10: DA204.9@6463.2,5084.3 6422,5084.3 6400,5106.3 6400,5189.6 6427.9,5217.5 6698.1,5217.5 6816.1,5099.4 7047.4,5099.4 7103.9,5042.9 7103.9,4931.1 7263.8,4771.3 7263.8,4192.2 7576.4,3879.5 9463,3879.5 9703.1,3639.3 9703.1,2996.6 9482.7,2776.2 9482.7,2119.7 9535.5,2066.9 10449.2,2066.9 10477.5,2095.3 11096.4,2095.3 11133.4,2058.3 11620.1,2058.3 11722.8,1955.5 11722.8,1616.1 11594.5,1487.8 DD114.56@11594.5,1395.2
ST4: DA206.1 DA206.16 DD114.60 | length 8622.9
  Top Layer w10: v1@6854.4,4419.3 6871.3,4436.2 7055.1,4436.2 7201.2,4290.2 7201.2,4166.9 7546.8,3821.3 9440.8,3821.3 9644.1,3618.1 9644.1,3020.3 9421.5,2797.7 9421.5,2098.6 9515,2005.1 10477.9,2005.1 10508.2,2035.4 11067.3,2035.4 11106.3,1996.5 11594.8,1996.5 11663.8,1927.6 11663.8,1643.3 11515.7,1495.2 DD114.60@11515.7,1395.2
  Top Layer w19.7: DA206.16@6093.1,4419.3 6198.3,4419.3 DA206.1@6308.5,4419.3
  Bottom Layer w10: v2(6198.2,4419.3) v1(6854.3,4419.3)
U: C515.1 C516.1 DA502.6 KT502.1 R521.2 R522.2 R523.2 | length 870.8
  Top Layer w19.7: DA502.6@10374.2,2350.5 10679.7,2350.5 C515.1@10685,2355.8 ; R521.2@10685.1,2273.2 10685.1,2355.8 10685.1,2438.5 10685.1,2517.2 R522.2@10689,2521.2 10689,2603.6 KT502.1@10637.8,2654.7 10693.8,2710.7 R523.2@10693.8,2785
U1: DA505.1 DD114.49 | length 2671.8
  Top Layer w10: DA505.1@10710.9,2885.9 10710.9,2853.4 10736.3,2827.9 10736.3,2639 10767.7,2607.5 10952.7,2607.5 11104.7,2759.4 11408.6,2759.4 11818.9,2349.4 11818.9,1331.9 11795.6,1308.6 DD114.49@11759.9,1308.6
U2: DA505.8 DD114.48 | length 2160.6
  Top Layer w10: DA505.8@11060.9,2885.9 11060.9,2825.4 11105.6,2780.7 11418.6,2780.7 11838.6,2360.5 11838.6,1324 11803.5,1288.9 DD114.48@11759.9,1288.9
U3: DA505.9 DD114.47 | length 2753.7
  Top Layer w10: DA505.9@11060.9,3101.3 11060.9,3152.6 11094.5,3186.2 11693,3186.2 11858.3,3020.9 11858.3,1316.2 11811.3,1269.2 DD114.47@11759.9,1269.2
U4: DA503.1 DA503.16 DD114.52 | length 2091.5
  Top Layer w10: v1(10838.6,2174.4) 10839.3,2173.6 11176,2173.6 11231.5,2118.1 11644.3,2118.1 11780.7,1981.7 11780.7,1563.4 11673.3,1456 DD114.52@11673.3,1395.2
  Top Layer w19.7: DA503.1@10840.8,2291.4 10840.8,2396.7 DA503.16@10840.8,2506.8
  Bottom Layer w10: v1(10838.6,2174.4) 10840.7,2176.6 v1(10840.7,2396.7)
UC1: DD114.55 R156.1 | length 2990.1
  Top Layer w10: R156.1@9843.6,2520.8 9833.7,2511 9833.7,2177.7 9925.6,2085.8 10437.4,2085.8 10465.7,2114.2 11105.9,2114.2 11142.5,2077.6 11630.1,2077.6 11741.7,1966 11741.7,1606.7 11614.2,1479.1 DD114.55@11614.2,1395.2
UIM: DA612.1 DA612.16 DD114.44 | length 5048.2
  Top Layer w10: DD114.44@11759.9,1210.2 11835,1210.2 11866.1,1241.3 11897.8,1241.3 11917.3,1261.1 11917.3,3776.8 11875.2,3818.9 v1@11864.6,3818.9
  Top Layer w19.7: DA612.16@11101,5153.3 DA612.1@11316.4,5153.3
  Bottom Layer w10: v1@11209.6,5154.7 11835.5,5154.7 11972.4,5017.7 11972.4,3977.6 11858.2,3863.4 11858.2,3825.2 v1@11864.6,3818.9
  other v1: 11864.5,3818.9 11209.5,5154.7
UIS: DA612.8 DA612.9 DD114.42 | length 5404.8
  Top Layer w10: DD114.42@11759.9,1170.8 11823.2,1170.8 11874,1221.6 11905.5,1221.6 11937,1253.1 11937,3812.2 11897.7,3851.6 v1@11889.8,3851.6
  Top Layer w19.7: DA612.9@11101,5503.3 DA612.8@11316.4,5503.3
  Bottom Layer w10: v1(11208.6,5501.2) 11290.9,5418.9 11869.7,5418.9 11992.1,5296.4 11992.1,3953.9 v1(11889.7,3851.6)
UOC: C512.2 DA501.7 KT501.1 R504.2 R508.2 R511.1 R512.1 R518.1 XP201.1 | length 13456
  Top Layer w10: XP201.1@5466.9,4950 5307.1,4950 4880.7,4523.6 4880.7,4181.5 4889.6,4172.6 4889.6,4167.8 5257.2,3800.1 6308.5,3800.1 6433.8,3674.8 6680.2,3674.8 6910.9,3905.5 7343.3,3905.5 7508.3,3740.5 9203.1,3740.5 9296,3647.6 9296,3466.5 9198.4,3368.8 8787.7,3368.8 8333.1,2914.2 8333.1,2715.7 7524,1906.7 7524,1798 7561.8,1760.2 7561.8,1445.6 7721.9,1285.4 8042.1,1285.4 8067.7,1259.8 8147.7,1259.8 8161.6,1273.8 8161.6,1276.5 8196.8,1311.7 R504.2@8196.8,1312.5 ; KT501.1@8907.9,1627.5 8907.9,1674.8 9134.6,1901.6 9848,1901.6 v1(9855.5,1894.1)
  Top Layer w19.7: R504.2@8196.9,1312.5 8318.9,1190.5 8590.6,1190.5 8665.4,1265.3 R511.1@8665.4,1328.3 ; DA501.7@8581.6,1613.1 8669.3,1613.1 R508.2@8669.3,1627.5 KT501.1@8907.9,1627.5 ; R512.1@8755.9,1328.3 R511.1@8665.4,1328.3 ; KT501.1@8907.9,1613.7 8665.4,1371.2 R511.1@8665.4,1328.3 ; R518.1@10228.4,2686.5 v1(10228.4,2727.3) C512.2@10228.4,2769.2
  Bottom Layer w10: v1(9855.5,1894.1) 9855.5,1978.7 10190.5,2313.8 10190.5,2689.8 10228.1,2727.3 v1(10228.4,2727.3)
VD101_1: R117.2 VD101.1 | length 91.2
  Top Layer w39.4: R117.2@11121,1708.5 11122.4,1707.2 VD101.1@11122.4,1617.9
VD113_2: K403.6 VD113.2 VT104.3 | length 320.9
  Top Layer w39.4: VD113.2@1523.6,2619.3 1562.2,2580.7 K403.6@1605.9,2580.7 VT104.3@1606.3,2358.1
VD114_2: K404.2 VD114.2 VT105.3 | length 1767.7
  Top Layer w39.4: VT105.3@1834.7,2358.1 1834.7,2816.1 1960.7,2942.1 2157.5,2942.1 2579.5,3364.2 K404.2@2579.5,3702
VD115_2: K405.6 VD115.2 VT106.3 | length 305.1
  Top Layer w39.4: VD115.2@2854.4,2579.9 2855.2,2580.7 K405.6@2936.6,2580.7 VT106.3@2936.6,2358.1
VD118_2: K408.6 VD118.2 VT109.3 | length 301.2
  Top Layer w39.4: VD118.2@4145.7,2579.9 4146.5,2580.7 K408.6@4224,2580.7 VT109.3@4224,2358.1
VD119_2: K409.6 VD119.2 VT110.3 | length 301.3
  Top Layer w39.4: VD119.2@4574.8,2579.9 4575.6,2580.7 4653.2,2580.7 VT110.3@4653.2,2358.1
VD121_2: K411.6 VD121.2 VT112.3 | length 301.2
  Top Layer w39.4: VD121.2@5433.1,2579.9 5433.9,2580.7 K411.6@5511.4,2580.7 VT112.3@5511.4,2358.1
VD123_2: K413.6 VD123.2 VT114.3 | length 301.2
  Top Layer w39.4: VD123.2@6291.4,2579.9 6292.2,2580.7 K413.6@6369.7,2580.7 VT114.3@6369.7,2358.1
VD124_2: K501.6 VD124.2 VT115.3 | length 166.9
  Top Layer w39.4: K501.6@8788.9,2744.4 8828.7,2744.4 VD124.2@8871.2,2701.9 ; VD124.2@8871.1,2701.9 VD124.2@8871.2,2701.9 ; VT115.3@8938.1,2701.9 VD124.2@8871.2,2701.9
VD125_2: K502.6 VD125.2 VT116.3 | length 157.4
  Top Layer w39.4: K502.6@9552.6,2744.4 9588.6,2744.4 VD125.2@9627.1,2705.8 VT116.3@9694,2705.8
VD304_1: C310.1 R316.1 VD304.1 VT304.2 VT304.4 | length 543.2
  Top Layer w39.4: VD304.1@3674.6,4518.3 VT304.4@3780.9,4518.3 ; C310.1@3737.7,4852.9 3737.7,4819.7 3780.9,4776.5 VT304.2@3780.9,4743.3 VT304.4@3780.9,4518.3 ; R316.1@3780.9,4433.9 VT304.4@3780.9,4518.3
VD602_1: VD602.1 VT601.1 VT603.2 VT603.4 | length 838.8
  Top Layer w19.7: VD602.1@8914.8,4340.1 VT601.1@8994.7,4340.1 9027.6,4340.1 9047.3,4359.8 9287.4,4359.8 9350.4,4296.8 VT603.2@9485.4,4296.8
  Top Layer w39.4: VT603.2@9485.4,4296.7 VT603.4@9719.3,4296.7
VD603_2: VD603.2 VT602.1 VT605.2 VT605.4 | length 1026.4
  Top Layer w19.7: VD603.2@8874,4617 8875.4,4615.7 8985.5,4615.7 8985.5,4679.8 9279.6,4973.9 VT605.2@9490.7,4973.9
  Top Layer w39.4: VT605.2@9490.7,4973.9 VT605.4@9714,4973.9
VD606_3: DA603.6 R622.1 VD606.3 VD607.1 | length 450.6
  Top Layer w19.7: VD606.3@8086.7,5237.7 8086.7,5265.9 8108.3,5287.5 8234.3,5287.5 8254,5267.9 ; 8234.2,5287.5 8253.9,5307.9 ; VD607.1@8254,5237.7 8254,5267.9 ; DA603.6@8292,5431.7 8292,5358.3 8277.6,5344 8277.6,5332.2 8254,5308.5 8254,5267.9
VD609_1: VD608.1 VD609.1 | length 63.3
  Top Layer w10: VD608.1@8430.2,499.8 VD609.1@8430.5,563.1
VD610_1: VD610.1 VD611.1 | length 78.7
  Top Layer w19.7: VD611.1@7264.6,1143.3 VD610.1@7343.3,1143.3
VD610_2: C619.2 DA610.3 DA611.3 R643.1 VD610.2 | length 803.7
  Top Layer w19.7: DA611.3@7104.5,893.6 7104.5,932.1 7129.8,957.3 7477.1,957.3 7478.5,958.7 ; VD610.2@7343.3,1010.1 7344.4,1009 7478.9,1009 7478.5,1008.6 7478.5,958.7 ; DA610.3@7478.5,893.3 7478.5,958.7 ; 7478.9,1010.8 7511.8,1043.7 7511.8,1124.3 C619.2@7512.6,1125.1
VD612_2: C620.2 C624.2 DA611.6 KT606.1 VD612.2 VD615.1 | length 1804.1
  Top Layer w19.7: DA611.6@7104.5,680.6 7104.5,731.6 7124.7,751.8 7244.1,751.8 VD612.2@7275.2,720.7 7302.4,748 C620.2@7353.9,748 7400,794.1 v2(7486.2,794.1) ; C624.2@8000.3,522.5 8000.3,405.6 VD615.1@8081.4,324.5 8081.9,324 KT606.1@8081.9,227.6
  Bottom Layer w19.7: v2(7486.2,794.1) 7486.2,519.7 7618.1,387.8 7921.6,387.8 KT606.1@8081.9,227.6
VD613_1: C621.2 C623.2 DA610.6 KT607.1 VD613.1 VD614.2 | length 1123.3
  Top Layer w19.7: DA610.6@7478.5,680.3 7478.5,727.8 7498.2,747.5 7621.8,747.5 VD613.1@7649.2,720.2 7676.4,747.4 C621.2@7727.9,747.4 7779.1,696.2 7779.1,383.2 VD614.2@7837.1,325.2 ; KT607.1@7837,227.6 7837.1,227.7 VD614.2@7837.1,325.2 ; C623.2@7919.2,521.8 7919.2,407.3 VD614.2@7837.1,325.2
VD614_1: R645.2 VD614.1 | length 62.9
  Top Layer w19.7: VD614.1@7837.1,459.1 R645.2@7837.1,522
VD615_2: R644.2 VD615.2 | length 63
  Top Layer w19.7: VD615.2@8081.4,458.4 R644.2@8081.4,521.4
VD702_1: R702.2 VD702.1 | length 87.4
  Top Layer w19.7: VD702.1@196.7,5187.7 198.7,5185.7 R702.2@283.3,5185.7
VD704_1: R704.2 VD704.1 | length 89
  Top Layer w19.7: VD704.1@196.7,5612.9 202.6,5618.8 R704.2@283.3,5618.8
VD705_1: R705.2 VD705.1 | length 91.4
  Top Layer w39.4: R705.2@9157.5,6548.7 9159.5,6546.8 VD705.1@9248.1,6546.8
VD707_1: R707.2 VD707.1 | length 87.4
  Top Layer w39.4: R707.2@8677.3,6548.7 8679.2,6546.8 VD707.1@8763.9,6546.8